# Altium PCB CarrierBoard.PcbDoc (part 1 of 2)
Units mm, origin at the board's own origin, x right, y up, seen from the top; angles counter-clockwise.
Board outline 96.12 x 102.87 mm, 2 copper layers (Top Layer, Bottom Layer), stack 1.6 mm thick; 58 components, 54 nets, 251 pads, 78 vias.
Unrouted connection lines stored in the file: 2.
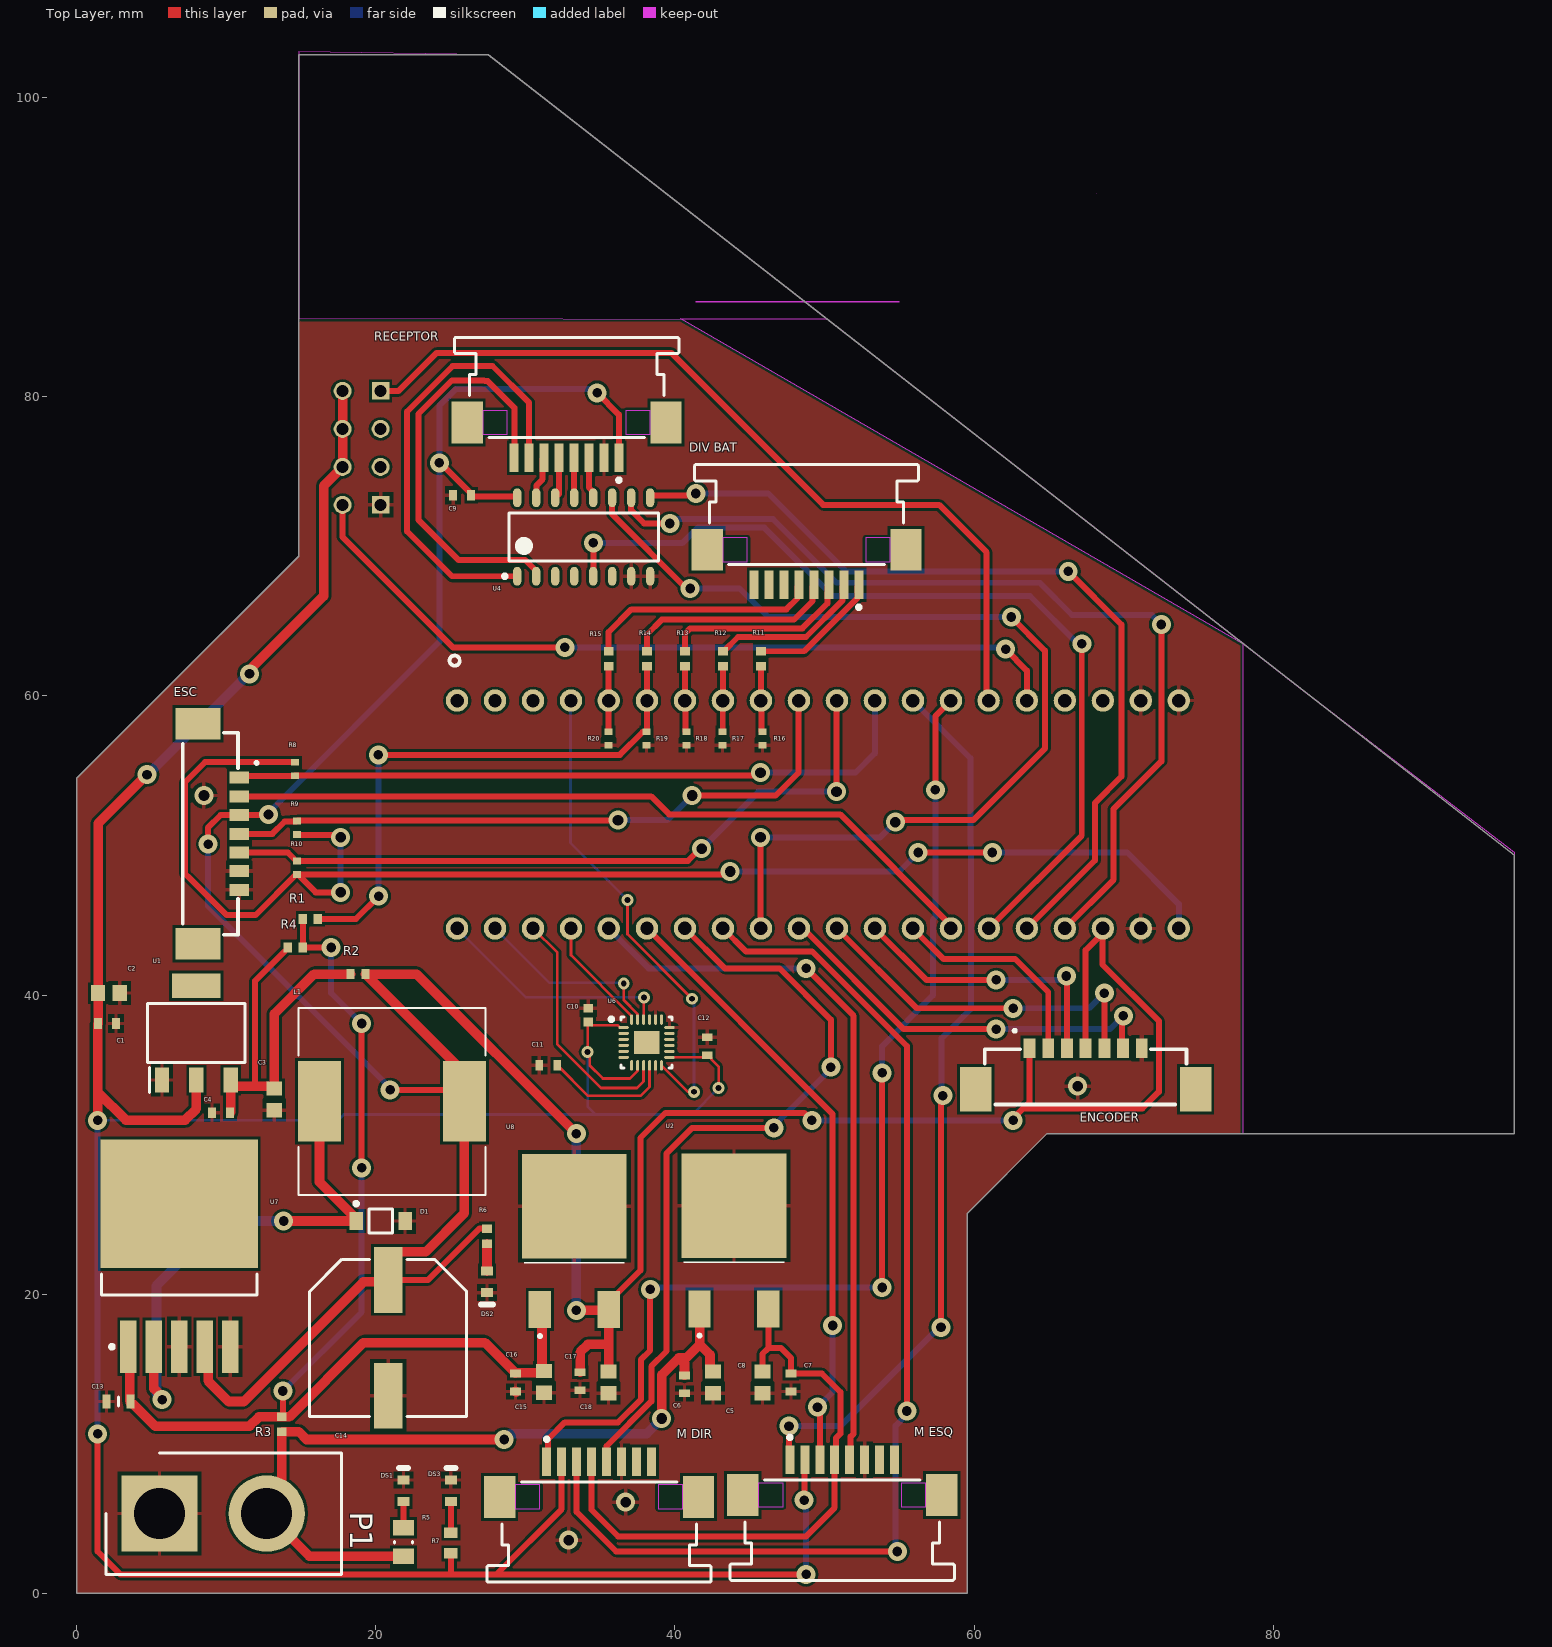
[diagram p0: Top Layer view]
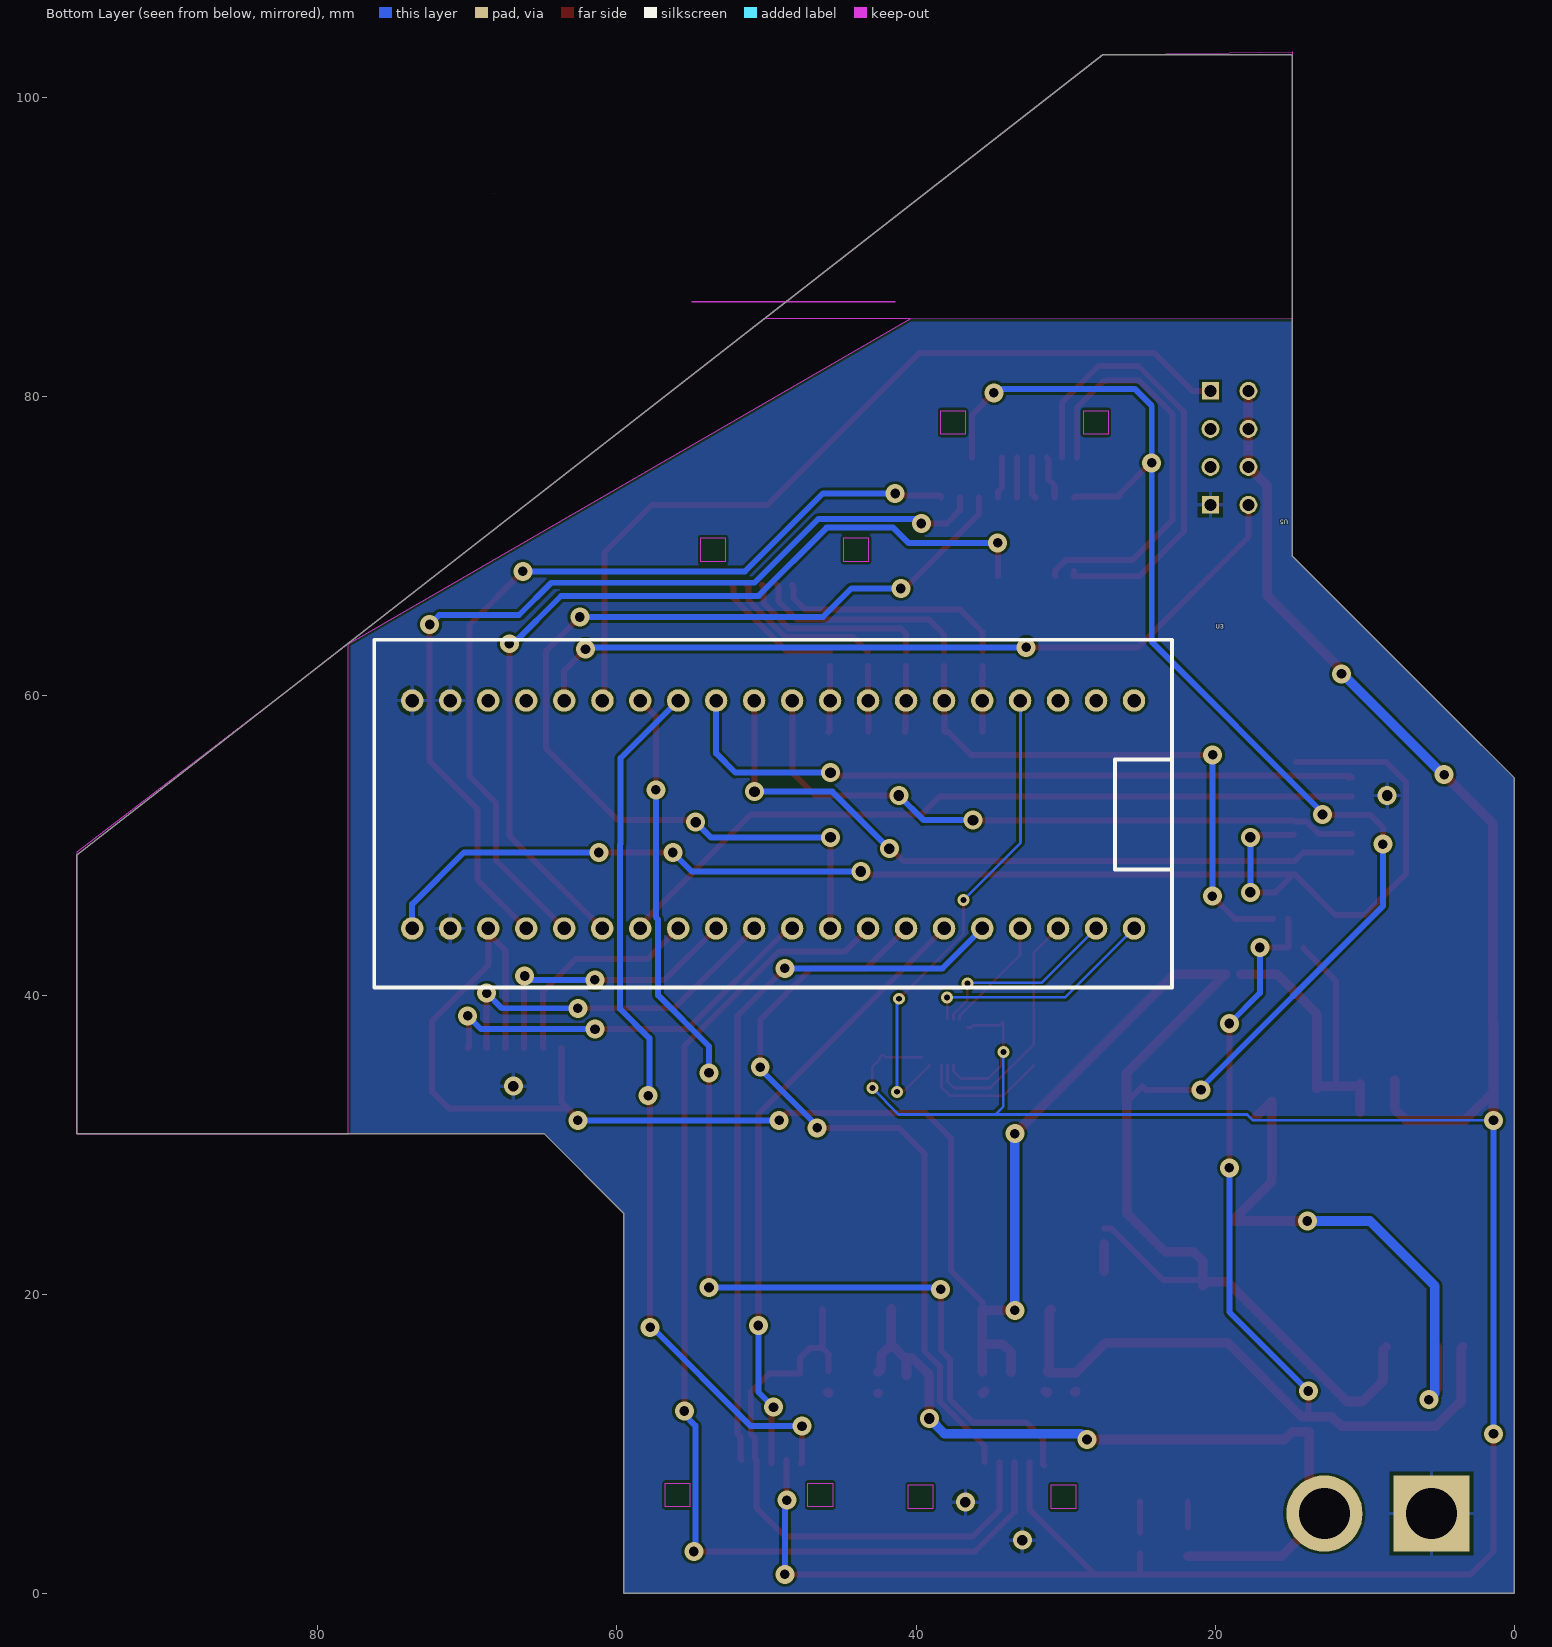
[diagram p1: Bottom Layer view, seen from below]

## Layer stack, top to bottom
Top Solder: solder mask 0.0102, Solder Resist, Dk 3.5
Top Layer: signal copper 0.0356
Dielectric 1: dielectric 1.5291, FR-4, Dk 4.8
Bottom Layer: signal copper 0.0356
Bottom Solder: solder mask 0.0102, Solder Resist, Dk 3.5

## Board outline
0,54.501 0,0 59.545,0 59.545,25.4 64.879,30.734 96.121,30.734 96.121,49.342 27.519,102.87 14.841,102.87 14.841,69.342 4.3,58.801
cut-out: 40.383,85.217 50.143,85.217 78.179,63.341
cut-out: 41.402,86.36
cut-out: 41.402,86.36 54.991,86.36
cut-out: 68.199,93.599
cut-out: 14.859,86.487
cut-out: 77.978,30.734 77.978,63.498 81.358,60.861 96.121,49.545 96.121,30.734
cut-out: 14.841,85.239 50.176,85.192 27.519,102.87 14.841,103.053

## Design rules (kind name [scope] priority, off if disabled: settings)
Clearance [All] p1: gap=0.178 ignorepadtopadclearanceinfootprint=TRUE
HoleSize [All] p1: absolutevalues=TRUE maxlimit=3.556 minlimit=0.025 maxpercent=80.000 minpercent=20.000
HoleToHoleClearance [All] p1: gap=0.178 allowstackedmicrovias=TRUE
MinimumSolderMaskSliver [All] p1: minsoldermaskwidth=0.114
PolygonConnect PolygonConnect_1 [All vs IsNamedPolygon('GND')] p1: connectstyle=Direct reliefconductorwidth=0.254 reliefentries=4 polygonreliefangle="90 Angle" airgapwidth=0.254
PolygonConnect [All] p2: connectstyle=Relief reliefconductorwidth=0.254 reliefentries=4 polygonreliefangle="90 Angle" airgapwidth=0.254
RoutingVias [All] p1: holewidth=0.4 width=0.797 viastyle="Through Hole" minholewidth=0.642 minwidth=1.27 maxholewidth=0.642 maxwidth=1.27
SilkToSolderMaskClearance [IsPad] p1: minsilkscreentomaskgap=0.084 clearancetoexposedcopper=TRUE
SolderMaskExpansion [All] p1: expansion=0.102
Width [All] p1: maxlimit=0.642 minlimit=0.178 preferedwidth=0.4
26 further rules are at their usual default settings.

## Classes and differential pairs
component class Designator: C13 C14 C15 C16 C17 C18 D1 L1 U7 U8
component class CarrierBoard: C1 C2 C3 C4 C5 C6 C7 C8 DS1 DS2 DS3 P1 R1 R2 R3 R4 R5 R6 U1 U2

## Components (designator, comment, footprint, x,y, rotation, side; value= is the part's Value field where it differs from the comment)
C1 "C1005X7R1H104K050BB" TDK-C1005-2_M 2.032,38.1 r180 top
C2 "1uF" CAPC1608X90X35ML10T15 2.159,40.132 r180 top
C3 "1uF" CAPC1608X90X35ML10T15 13.208,33.02 r90 top
C4 "C1005X7R1H104K050BB" TDK-C1005-2_M 9.652,32.131 r0 top
C5 "1uF" CAPC1608X90X35ML10T15 42.545,14.097 r90 top
C6 "C1005X7R1H104K050BB" TDK-C1005-2_M 40.64,13.97 r90 top
C7 "C1005X7R1H104K050BB" TDK-C1005-2_M 47.752,14.097 r90 top
C8 "1uF" CAPC1608X90X35ML10T15 45.847,14.097 r90 top
C9 "C1005X7R1H104K050BB" TDK-C1005-2_M 25.769,73.418 r0 top
C10 "10n" CAPC1005X55N 34.2,38.656 r90 top
C11 "C1005X7R1H104K050BB" TDK-C1005-2_M 31.531,35.306 r0 top
C12 "C1005X7R1H104K050BB" TDK-C1005-2_M 42.164,36.576 r270 top
C13 "C1608X5R1V335K080AC" CAPC1608X80N 2.794,12.827 r0 top
C14 "EEE-FK1H221P" PNSC-EEE-1HA221P_L 20.828,17.083 r270 top
C15 "1uF" CAPC1608X90X35ML10T15 31.242,14.134 r90 top
C16 "C1005X7R1H104K050BB" TDK-C1005-2_M 29.337,14.097 r90 top
C17 "C1005X7R1H104K050BB" TDK-C1005-2_M 33.655,14.183 r90 top
C18 "1uF" CAPC1608X90X35ML10T15 35.56,14.097 r90 top
D1 "MBR0540T1G" ONSC-SOD-123-2-425-04_V 20.32,24.892 r0 top
"DIV BAT" "52271-0879" MOLX-52271-0879 48.795,68.599 r180 top (schematic designator J6)
DS1 "TLMB1100-GS08" VISH-TLMX1100-2_V 21.844,6.858 r90 top
DS2 "TLMS1100-GS08" VISH-TLMX1100_V 27.432,20.828 r270 top
DS3 "TLMY1100-GS08" VISH-TLMX1100-2_V 25.019,6.858 r90 top
ENCODER "53398-0771" 53398-0771 60.707,36.381 r0 top
ESC "53398-0771" 53398-0771 10.795,57.531 r270 top
L1 "SRR1260-101M" *INDP125125X600N 21.082,32.893 r0 top
"M DIR" "52271-0879" MOLX-52271-0879 34.925,7.62 r0 top (schematic designator J7)
"M ESQ" "52271-0879" MOLX-52271-0879 51.181,7.747 r0 top (schematic designator J8)
P1 "VBAT5S" SHDR2W320P716_1X2_1574X813X1588P 5.537,5.334 r0 top
R1 "Jumper" RESC0402(1005)_N 15.621,45.085 r180 top value="0.00 Ohm"
R2 "Jumper" RESC0402(1005)_N 18.804,41.402 r180 top value="0.00 Ohm"
R3 "Jumper" RESC0402(1005)_N 13.716,11.303 r90 top value="0.00 Ohm"
R4 "Jumper" RESC0402(1005)_N 14.613,43.18 r180 top value="0.00 Ohm"
R5 "1K" RESC0805(2012)_N 21.844,3.429 r270 top value="1000.00 Ohm"
R6 "270R" RESC0402(1005)_N 27.432,23.876 r90 top value="270.00 Ohm"
R7 "220R" RESC1608X55X25NL10T15 25.019,3.364 r270 top
R8 "10K" RESC0402(1005)_L 14.605,55.118 r90 top value="10000.00 Ohm"
R9 "10K" RESC0402(1005)_L 14.732,51.181 r90 top value="10000.00 Ohm"
R10 "10K" RESC0402(1005)_L 14.732,48.514 r270 top value="10000.00 Ohm"
R11 "56K" RESC0402(1005)_N 45.749,62.484 r90 top value="56000.00 Ohm"
R12 "56K" RESC0402(1005)_N 43.209,62.484 r90 top value="56000.00 Ohm"
R13 "56K" RESC0402(1005)_N 40.669,62.484 r90 top value="56000.00 Ohm"
R14 "56K" RESC0402(1005)_N 38.129,62.484 r90 top value="56000.00 Ohm"
R15 "56K" RESC0402(1005)_N 35.569,62.484 r90 top value="56000.00 Ohm"
R16 "10K" RESC0402(1005)_L 45.847,57.15 r90 top value="10000.00 Ohm"
R17 "10K" RESC0402(1005)_L 43.18,57.15 r90 top value="10000.00 Ohm"
R18 "10K" RESC0402(1005)_L 40.767,57.15 r90 top value="10000.00 Ohm"
R19 "10K" RESC0402(1005)_L 38.1,57.15 r90 top value="10000.00 Ohm"
R20 "10K" RESC0402(1005)_L 35.56,57.15 r90 top value="10000.00 Ohm"
RECEPTOR "52271-0879" MOLX-52271-0879 32.754,77.101 r180 top (schematic designator J5)
U1 "LD1117S33CTR" SOT230P700X190-4N 8.001,37.465 r90 top
U2 "AS7815ADTR-G1" ZLDO1117K50TC 43.942,22.728 r0 top
U3 "Blue Pill" "blue pill" 19.333,63.464 r0 bottom
U4 "SN74LS151DR" D0016A_L 33.897,70.624 r90 top
U5 "ESP8266 Wifi module 01" ESP01 16.179,83.835 r0 bottom
U6 "MPU-9250" INSE-QFN-24-1700X1540TP_L 38.1,36.83 r0 top
U7 "LM2596SX-5.0/NOPB" TS5B_M 6.858,22.535 r90 top
U8 "AS7805ADTR-G1" ZLDO1117K50TC 33.274,22.698 r0 top

## Footprints (in the part's own frame and the unit in brackets; to place one, negate y for a bottom-side part, rotate by r counter-clockwise, add the part's x,y. Pads: shape width x height; smd on the part's side, far side on the other; paste and mask are expansions set on the pad)
53398-0771 [mm]
  rect 0.8x1.3 smd: 1(3,0.068) 2(4.25,0.068) 3(5.5,0.068) 4(6.75,0.068) 5(8,0.068) 6(9.25,0.068) 7(10.5,0.068)
  rect 2.1x3 smd: 8(-0.6,-2.682) 9(14.1,-2.682)
  silkscreen extent 0,-3.7 13.5,1.3
*INDP125125X600N [mm]
  rect 2.9x5.4 smd: 1(-4.85,0) 2(4.85,0)
  silkscreen extent -6.25,-6.25 6.25,6.25
"blue pill" [mm]
  round 1.5 hole 0.9: 1(6.096,3.774) 2(8.636,3.774) 3(11.176,3.774) 4(13.716,3.774) 5(16.236,3.774) 6(18.796,3.774) 7(21.336,3.774) 8(23.876,3.774) 9(26.416,3.774) 10(28.956,3.774) 11(31.496,3.774) 12(34.036,3.774) 13(36.576,3.774) 14(39.116,3.774) 15(41.636,3.774) 16(44.196,3.774) 17,(46.736,3.774) 18(49.276,3.774) 19(51.816,3.774) 20(54.356,3.774) 21(54.356,19.014) 22(51.816,19.014) 23(49.276,19.014) 24(46.736,19.014) 25(44.196,19.014) 26(41.656,19.014) 27(39.116,19.014) 28(36.576,19.014) 29(34.036,19.014) 30(31.496,19.014) 31(28.956,19.014) 32(26.416,19.014) 33(23.876,19.014) 34(21.336,19.014) 35(18.796,19.014) 36(16.236,19.014) 37(13.716,19.014) 38(11.176,19.014) 39(8.636,19.014) 40(6.096,19.014)
  silkscreen extent 3.56,-0.29 56.9,22.95, body extent 0.1,-0.04 57.66,22.82, height 9.77
CAPC1005X55N [mm]
  rect 0.6x0.62 smd: 1(-0.46,0) 2(0.46,0)
  body extent -0.5,-0.25 0.5,0.25, height 0.55
CAPC1608X80N [mm]
  rect 0.54x0.94 smd: 1(-0.8,0) 2(0.8,0)
  silkscreen extent 0,-0.3 0,0.3, body extent -0.8,-0.4 0.8,0.4, height 0.8
CAPC1608X90X35ML10T15 [mm] "Chip Capacitor, 2-Leads, Body 1.60x0.80mm, IPC Low Density"
  rect 0.95x1.05 smd: 1(-0.725,0) 2(0.725,0)
  body extent -0.85,-0.45 0.85,0.45, height 0.9
D0016A_L [mm] "SOIC, 16-Leads, Body 10x4mm, Pitch 1.27mm, IPC High Density"
  oval 1.25x0.55 smd: 1(-2.625,4.445) 2(-2.625,3.175) 3(-2.625,1.905) 4(-2.625,0.635) 5(-2.625,-0.635) 6(-2.625,-1.905) 7(-2.625,-3.175) 8(-2.625,-4.445) 9(2.625,-4.445) 10(2.625,-3.175) 11(2.625,-1.905) 12(2.625,-0.635) 13(2.625,0.635) 14(2.625,1.905) 15(2.625,3.175) 16(2.625,4.445)
  silkscreen extent -2.75,-5 1.6,5.39, body extent -3,-4.95 3,4.95, height 1.59
ESP01 [mil]
  round 47.25 / inner round 60 / far side round 47.25 hole 31.5: CH_PD(63.05,335.59) GPIO0(163.05,235.59) GPIO2(163.05,335.59) RST(63.05,235.59) TX(63.05,435.59) VCC(63.05,135.59)
  rect 45.75x45.75 / inner rect 60x60 / far side rect 45.75x45.75 hole 31.5: GND(163.05,435.59) RX(163.05,135.59)
  body extent 3,0 987,570, height 137
INSE-QFN-24-1700X1540TP_L [mm] "QFN, 24-Leads, Body 3.1x3.1mm, Pitch 0.40mm, Thermal Pad 1.54x1.70mm, IPC High Density"
  oval 0.7x0.2 smd: 1(-1.532,1) 2(-1.532,0.6) 3(-1.532,0.2) 4(-1.532,-0.2) 5(-1.532,-0.6) 6(-1.532,-1) 13(1.532,-1) 14(1.532,-0.6) 15(1.532,-0.2) 16(1.532,0.2) 17(1.532,0.6) 18(1.532,1)
  oval 0.2x0.7 smd: 7(-1,-1.532) 8(-0.6,-1.532) 9(-0.2,-1.532) 10(0.2,-1.532) 11(0.6,-1.532) 12(1,-1.532) 19(1,1.532) 20(0.6,1.532) 21(0.2,1.532) 22(-0.2,1.532) 23(-0.6,1.532) 24(-1,1.532)
  rect 1.7x1.54 smd: 25(0,0)
  silkscreen extent -2.47,-1.7 1.7,1.7, body extent -1.55,-1.55 1.55,1.55, height 1.05
MOLX-52271-0879 [mm] "FPC Connector, 8-Leads, Right Angle, Pitch 1.0 mm, Mated Height 3.0 mm, SMT"
  rect 0.6x1.9 smd: 1(-3.5,1.175) 2(-2.5,1.175) 3(-1.5,1.175) 4(-0.5,1.175) 5(0.5,1.175) 6(1.5,1.175) 7(2.5,1.175) 8(3.5,1.175)
  rect 2.1x2.8 smd: MP1(-6.65,-1.175) MP2(6.65,-1.175)
  Keep-Out Layer region: -5.6,-1.975 -3.95,-1.975 -3.95,-0.375 -5.6,-0.375
  Keep-Out Layer region: 3.95,-1.975 5.6,-1.975 5.6,-0.375 3.95,-0.375
  silkscreen extent -7.5,-6.87 7.5,2.8, body extent -7.5,-6.87 7.5,1.83, height 3.01
ONSC-SOD-123-2-425-04_V [mm] "SOD, 2-Leads, Body 2.69x1.6mm"
  rect 0.91x1.22 smd: 1(-1.635,0) 2(1.635,0)
  silkscreen extent -1.76,-0.8 0.78,1.28, body extent -1.35,-0.8 1.35,0.8, height 1.35
PNSC-EEE-1HA221P_L [mm] "Aluminum Electrolytic Capacitor, 2-Leads, Body 10.5x10.5mm, IPC High Density"
  rect 4.4x1.9 smd: 1(-3.875,0) 2(3.875,0)
  silkscreen extent -5.25,-5.25 5.25,5.25, body extent -5.36,-5.25 5.36,5.25, height 10.5
RESC0402(1005)_L [mm] "Chip Resistor, Body 1.0x0.5mm, IPC High Density"
  rect 0.45x0.55 smd: 1(-0.45,0) 2(0.45,0)
  body extent -0.52,-0.27 0.53,0.28, height 0.4
RESC0402(1005)_N [mm] "Chip Resistor, Body 1.0x0.5mm, IPC Medium Density"
  rect 0.55x0.65 smd: 1(-0.5,0) 2(0.5,0)
  body extent -0.52,-0.27 0.53,0.28, height 0.4
RESC0805(2012)_N [mm] "Chip Resistor, Body 2.0x1.3mm, IPC Medium Density"
  rect 1.05x1.4 smd: 1(-0.95,0) 2(0.95,0)
  silkscreen extent -0.05,-0.6 0.05,0.6, body extent -1.1,-0.67 1.1,0.68, height 0.7
RESC1608X55X25NL10T15 [mm] "Chip Resistor, 2-Leads, Body 1.60x0.80mm, IPC Medium Density"
  rect 0.7x0.9 smd: 1(-0.7,0) 2(0.7,0)
  body extent -0.85,-0.45 0.85,0.45, height 0.55
SHDR2W320P716_1X2_1574X813X1588P [mm]
  rect 5.1x5.1 hole 3.4: 1(0,0)
  round 5.1 hole 3.4: 2(7.163,0)
  silkscreen extent -3.58,-4.06 12.15,4.06
SOT230P700X190-4N [mm]
  rect 1.65x0.95 smd: 1(-3.15,2.3) 2(-3.15,0) 3(-3.15,-2.3)
  rect 1.65x3.25 smd: 4(3.15,0)
  silkscreen extent -3.98,-3.25 1.97,3.25
TDK-C1005-2_M [mm] "Chip Capacitor, 2-Leads, Body 1.05x0.55mm, IPC Low Density"
  rect 0.52x0.72 smd: 1(-0.6,0) 2(0.6,0)
  body extent -0.52,-0.28 0.53,0.27, height 0.55
TS5B_M [mm] "D2-PAK, 6-Leads, Body 8.6x10.2mm, Pitch 1.7mm, Lead Span 14.1mm, IPC Low Density"
  rect 3.5x1.1 smd: 1(-6.05,3.4) 2(-6.05,1.7) 3(-6.05,0) 4(-6.05,-1.7) 5(-6.05,-3.4)
  rect 8.6x10.5 smd: 6(3.5,0)
  silkscreen extent -6.17,-5.2 -1.2,5.2, body extent -2.6,-5.2 6.29,5.2, height 4.65
VISH-TLMX1100-2_V [mm] "SMD, 2-Leads, Body 1.6x0.8mm"
  rect 0.6x0.8 smd: 1(-0.725,0) 2(0.725,0)
  silkscreen extent 1.53,-0.3 1.53,0.3, body extent -0.8,-0.4 0.8,0.4, height 0.65
VISH-TLMX1100_V [mm] "SMD, 2-Leads, Body 1.6x0.8mm"
  rect 0.6x0.8 smd: 1(-0.725,0) 2(0.725,0)
  silkscreen extent 1.53,-0.4 1.53,0.4, body extent -0.8,-0.4 0.8,0.4, height 0.65
ZLDO1117K50TC [mm]
  rect 1.5x2.5 smd: 1(-2.3,-3.72) 3(2.3,-3.72)
  rect 7x7 smd: 2(0,3.18)
  silkscreen extent -3.35,-5.6 3.35,-0.6

## Part data
C1 C4 C6 C7 C9 C11 C12 C16 C17: library part CMP-2000-05393-1, "Chip Capacitor, 0.1 uF, +/- 10%, 50 V, -55 to 125 degC, 0402(1005 Metric), RoHS, Tape and Reel", Capacitance=0.1µF, Manufacturer=TDK, Operating Temperature=-55degC~125degC, Package / Case=0402(1005Metric), PCN Part Number=MLCCPartNumberChange30/Nov/2012, Ratings=-, Standard Package=1, Temperature Coefficient=X7R, Tolerance=±10%, Voltage - Rated=50V, Applications=GeneralPurpose, Category=Capacitors, Datasheet URL=http://www.farnell.com/datasheets/1913358.pdf, Datasheet Version=Mar-15, Family=CeramicCapacitors, Features=-, Height - Seated (Max)=-, Kits=445-9021-KIT-ND-KITMLCC100PF-10UF04026.3-50V445-9003-KIT-ND-KITCAPCERHICAPMLCCSMD, Lead Spacing=-, Lead Style=-, Manufacturer URL=http://www.tdk.com/, Mounting Type=SurfaceMount,MLCC, Online Catalog=CSeries,GeneralPurpose, Other Names=445-5932-1, Packaging=CutTape(CT), Product Training Modules=CSeriesGeneralApplicationsSEAT,CCV,andTVCLDesignToolsGuidetoReplacinganElectrolyticCapacitorwithanMLCC, RoHS Information=RoHSCertificate-MLCC, Series=C
C2 C3 C5 C8 C15 C18: library part CMP-2006-02823-1, "MURATA   GRM188R61H105KAALD   Multilayer Ceramic Capacitor, GRM Series, 1 F,  10%, X5R, 50 V, 0603 [1608 Metric]", Case/Package=0603, Case Code (Metric)=1608, Dielectric=X7R, Manufacturer=Murata, Manufacturer Part Number=GRM188R61H105KAALD, Max Operating Temperature=85°C, Min Operating Temperature=-55°C, Package Quantity=4000, Supplier Part Number 1=81-GRM188R61H105KALD, Tolerance=10%, Voltage=50V, Capacitance=1uF, Case Code (Imperial)=0603, ComponentLink1Description=http://www.farnell.com/datasheets/2048611.pdf?src-supplier=Newark, ComponentLink1URL=http://www.farnell.com/datasheets/2048611.pdf?src-supplier=Newark, ComponentLink2Description=http://www.farnell.com/datasheets/1747450.pdf?src-supplier=Element14, ComponentLink2URL=http://www.farnell.com/datasheets/1747450.pdf?src-supplier=Element14, ComponentLink3Description=https://www.distrelec.biz/Web/Downloads/_t/ds/murata_MLCC_eng_tds.pdf?mime=application%2Fpdf&src-supplier=Distrelec, ComponentLink3URL=https://www.distrelec.biz/Web/Downloads/_t/ds/murata_MLCC_eng_tds.pdf?mime=application%2Fpdf&src-supplier=Distrelec, Composition=Ceramic, Datasheet=https://br.mouser.com/datasheet/2/281/murata_03052018_GRM_Series_1-1310166.pdf, Depth=0.8mm, Height=0.8mm, Lead Free="Lead Free", Length=1.6mm, Material=Ceramic, Mount="Surface Mount", Packaging="Tape and Reel", Part Number=GRM188R61H105KAALD, Radiation Hardening=No, REACH SVHC="No SVHC", Stock 1=0, Supplier 1=Mouser, Termination=SMD/SMT, Thickness=0.035inch, Voltage Rating=50V, Voltage Rating (DC)=50V, Weight=0.000222oz, Width=0.8mm
C10: library part GRM155R71E103JA01J, "Capacitor", Manufacturer_Name="Murata Electronics", Mouser Part Number=81-GRM155R71E103JA1J, Datasheet Link=http://www.murata.com/~/media/webrenewal/support/library/catalog/products/capacitor/mlcc/c02e.pdf, Height=0.55mm, Manufacturer_Part_Number=GRM155R71E103JA01J, Mouser Price/Stock=https://www.mouser.com/Search/Refine.aspx?Keyword=81-GRM155R71E103JA1J
C13: "Capacitor 3.3uF", Capacitance=3.3uF, Case/Package=0603, Case Code (Metric)=1608, Dielectric=X5R, Dielectric Material=Ceramic, Manufacturer=TDK, Max Operating Temperature=85°C, Min Operating Temperature=-55°C, Mouser Part Number=810-C1608X5R1V335KAC, Package Quantity=4000, Supplier Part Number 1=445-14167-1-ND, Tolerance=10%, Voltage Rating=35V, Case Code (Imperial)=0603, ComponentLink1Description=https://datasheet.ciiva.com/14909/tdkmlcccaprange-14909925.pdf?src-supplier=Digi-Key, ComponentLink1URL=https://datasheet.ciiva.com/14909/tdkmlcccaprange-14909925.pdf?src-supplier=Digi-Key, ComponentLink2Description=https://datasheet.ciiva.com/14909/tdkmlcccaprange-14909926.pdf?src-supplier=Digi-Key, ComponentLink2URL=https://datasheet.ciiva.com/14909/tdkmlcccaprange-14909926.pdf?src-supplier=Digi-Key, Datasheet Link=https://product.tdk.com/info/en/catalog/datasheets/mlcc_commercial_midvoltage_en.pdf, Height=0.8mm, Lead Free="Lead Free", Length=0.063inch, Manufacturer_Name=TDK, Manufacturer_Part_Number=C1608X5R1V335K080AC, Manufacturer Part Number=C1608X5R1V335K080AC, Mount="Surface Mount", Mouser Price/Stock=https://www.mouser.com/Search/Refine.aspx?Keyword=810-C1608X5R1V335KAC, Packaging="Tape and Reel", Pricing 1="1 = 0,45000, 10 = 0,31100, 100 = 0,18630, 500 = 0,13972, 1000 = 0,11799 (USD)", RoHS=Yes, Stock 1=4798, Supplier 1=Digi-Key, Termination=SMD/SMT, Thickness=0.035inch, Voltage Rating (DC)=35V, Weight=7.1E-05oz, Width=0.8mm
C14: library part CMP-2000-06200-1, "Aluminum Electrolytic Capacitor, 220 uF, +/- 20%, 50 V, -40 to 85 degC, 2-Pin SMD, RoHS, Tape and Reelhttps://br.mouser.com/ProductDetail/Panasonic/EEE-FK1H221P?qs=%2Fha2pyFaduioJWBrqH8qNcijPCQSw77%252BpLytlHuDdeup2lEE5e2lgA%3D%3D", AE Capacitor Case=RadialCan-SMD, Capacitance=220µF, Capacitance Tolerance=±20%, Life Time @ Temperature=2000hours@85°C, Manufacturer=Panasonic, Operating Temperature Max=85°C, Operating Temperature Min=-40°C, Package Description="2-Pin Surface Mount Device, Body 10.3 x 10.3 mm", Package Reference=SMD, Ripple Current AC=300mA, Voltage Rating=50V, Capacitance Tolerance ±=±20%, Capacitor Case Style=RadialCan-SMD, Datasheet URL=https://br.mouser.com/datasheet/2/315/ABA0000C1181-947564.pdf, Datasheet Version=11/2012, Diameter=10mm, Height=10.2mm, Lifetime @ Temperature=2000hours@85°C, Manufacturer URL=http://www.panasonic.com/, Mounting Technology=SurfaceMount, Packaging=CutTape, Product Range=PANASONIC-SSeries, SVHC=ToBeAdvised
D1: library part CMP-1055-00401-1, "Schottky Power Rectifier, 2-Pin SOD-123, Pb-Free, Tape and Reel", Manufacturer="On Semiconductor", ComponentLink1Description="Manufacturer URL", ComponentLink1URL=http://www.onsemi.com/, ComponentLink2Description=Datasheet, ComponentLink2URL=http://www.onsemi.cn/pub_link/Collateral/MBR0540T1-D.PDF, ComponentLink3Description="Package Specification", ComponentLink3URL=http://www.onsemi.com/pub_link/Collateral/425-04.PDF, Configuration=Single, Datasheet=https://br.mouser.com/datasheet/2/315/ABA0000C1181-947564.pdf, DatasheetVersion="Rev. 7", IFSM Max (A)=5.5, Mounting Technology="Surface Mount", PackageDescription="2-Pin SOD, Body 1.6 x 2.69 mm", PackageReference=SOD-123-2-425-04, PackageVersion="Rev. G, 10/2009", Packing="Tape and Reel", PartNumber=MBR0540T1G, RoHS=TRUE
"DIV BAT" "M DIR" "M ESQ" RECEPTOR: library part CMP-1241-00231-1, "1.0 mm Pitch Easy-On(TM) Type FPC Connector, 3.0 mm Mated Height, Right Angle, ZIF, SMT, Bottom Contact, 8 Circuits, -40 to 85 degC, ELV and RoHS Compliant, Tape and Reel", Current (Max per Contact)=0.5A, Manufacturer=Molex, Voltage (Max)="50V AC (RMS)/DC", Circuits (Loaded)=8, ComponentLink1Description="Manufacturer URL", ComponentLink1URL=http://www.molex.com/molex/index.jsp, ComponentLink2Description=Datasheet, ComponentLink2URL=http://www.molex.com/webdocs/datasheets/pdf/en-us/0522710879_FFC_FPC_CONNECTORS.pdf, ComponentLink3Description="Package Specification", ComponentLink3URL=http://www.molex.com/pdm_docs/sd/522710879_sd.pdf, Contact Position=Bottom, Durability (mating cycles max)=30, Entry Angle="90degrees Angle", Mated Height=3.00mm, Material - Metal="Phosphor Bronze", Material - Plating Mating=Tin-Bismuth, Material - Plating Termination=Tin-Bismuth, Mounting Technology="Surface Mount", Number of Rows=1, Orientation="Right Angle", PackageDescription="8-Lead FPC Connector, Pitch 1.0 mm", PackageReference=52271-0879, PackageVersion="Rev. B, 04/2004", Packing="Tape and Reel", PartNumber=52271-0879, PCB Locator=No, PCB Retention=Yes, Pitch - Mating Interface=1.00mm, Pitch - Termination Interface=1.00mm, Polarized to PCB=Yes, RoHS=TRUE, Stackable=No
DS1: library part CMP-1666-00028-1, "Blue LED, 10 mA, 3.9 V, -40 to 100 degC, 2-Pin SMD (0603), RoHS, Tape and Reel                  TLMB1100-GS08", Capacitance="10 nF", Case\Package=Radial, Max Operating Temperature="125 degC", Min Operating Temperature="-55 degC", Package Quantity=500, Tolerance=10%, Type (Capacitors)=X7R, Voltage Rating="100 V", ComponentLink1Description="Manufacturer URL", ComponentLink1URL=http://www.vishay.com/, ComponentLink2Description=Datasheet, ComponentLink2URL=http://download.siliconexpert.com/pdfs/2016/8/7/12/43/26/667/vsh_/manual/379263299541529tlmb1100.pdf, DatasheetVersion="Rev. 2.7, 03/2016", Height="2.54 mm", Lead Pitch="2.54 mm", Length="5.33 mm", Mount="Through Hole", PackageDescription="2-Pin Surface Mount Device, Body 1.6 x 0.8 mm", PackageReference=0603, Packaging=Bulk, Pins=2, Radiation Hardening=No, REACH SVHC="No SVHC", RoHSCompliant=true, Width="3.81 mm"
DS2: library part CMP-1666-00027-1, "LED, RED, 2.1 V, -40 to 100 degC, 2-Pin SMD (0603), RoHS, Tape and Reel", Capacitance="12 pF", Case/Package=0603, Case Code (Metric)=1608, Max Operating Temperature=125degC, Min Operating Temperature=-55degC, Package Quantity=4000, Resistance="100000000000 Ohm", Tolerance=5%, Type (Capacitors)=C0G, Voltage Rating="50 V", Case Code (Imperial)=0603, ComponentLink1Description="Manufacturer URL", ComponentLink1URL=http://www.vishay.com/, ComponentLink2Description=Datasheet, ComponentLink2URL=http://www.vishay.com/docs/83173/tlmb1100.pdf, DatasheetVersion="Rev. 2.7, 03/2016", Height="0.8 mm", Length="1.6 mm", Mount="Surface Mount", PackageDescription="2-Pin Surface Mount Device, Body 1.6 x 0.8 mm", PackageReference=TLMX1100, Packaging="Tape and Reel", Pins=2, Radiation Hardening=No, REACH SVHC="No SVHC", RoHSCompliant=True, Voltage Rating (DC)="50 V", Width="0.8 mm"
DS3: library part CMP-1666-00030-1, "Yellow LED, 20 mA, 2.1 V, -40 to 100 degC, 2-Pin SMD (0603), RoHS, Tape and Reel             TLMY1100-GS08", ComponentLink1Description="Manufacturer URL", ComponentLink1URL=http://www.vishay.com/, ComponentLink2Description=Datasheet, ComponentLink2URL=http://download.siliconexpert.com/pdfs/2016/8/7/12/43/26/667/vsh_/manual/379263299541529tlmb1100.pdf, DatasheetVersion="Rev. 2.7, 03/2016", PackageDescription="2-Pin Surface Mount Device, Body 1.6 x 0.8 mm", PackageReference=0603
ENCODER ESC: "7 way SMT straight header Molex PICOBLADE Series, Series Number 53398, 1.25mm Pitch 7 Way 1 Row Straight PCB Header, Solder Termination, 1A", Manufacturer_Name=Molex, RS Part Number=5427220P, Allied_Number=70373150, Allied Price/Stock=http://www.alliedelec.com/molex-incorporated-53398-0771/70373150/, Arrow Part Number=53398-0771, Arrow Price/Stock=http://uk.rs-online.com/web/p/products/5427220P, Datasheet Link=http://www.molex.com/webdocs/datasheets/pdf/en-us/0533980771_PCB_HEADERS.pdf, Manufacturer_Part_Number=53398-0771, RS Price/Stock=http://uk.rs-online.com/web/p/products/5427220P
L1: library part SRR1260-220M, "FIXED IND 100UH 1.7A 180 MOHM", Case/Package=1260, Current Rating=1.7A, DC Resistance (DCR)=180mR, Frequency=6.07MHz, Inductance=100uH, Inductance Tolerance=20%, Manufacturer=Bourns, Max Operating Temperature=125°C, Min Operating Temperature=-40°C, Mouser Part Number=652-SRR1260-220M, Package Quantity=600, Resistance=180MR, RS Part Number=7272246P, Supplier Part Number 1=652-SRR1260-101M, Test Frequency=100kHz, Allied_Number=70277063, Allied Price/Stock=https://www.alliedelec.com/bourns-srr1260-220m/70277063/, ComponentLink1Description=http://www.bourns.com/docs/Product-Datasheets/SRR1260.pdf?src-supplier=Digi-Key, ComponentLink1URL=http://www.bourns.com/docs/Product-Datasheets/SRR1260.pdf?src-supplier=Digi-Key, ComponentLink2Description=http://uk.rs-online.com/webdocs/0def/0900766b80defded.pdf?src-supplier=RSComponents, ComponentLink2URL=http://uk.rs-online.com/webdocs/0def/0900766b80defded.pdf?src-supplier=RSComponents, ComponentLink3Description=http://www.farnell.com/datasheets/1430852.pdf?src-supplier=Element14, ComponentLink3URL=http://www.farnell.com/datasheets/1430852.pdf?src-supplier=Element14, ComponentLink4Description=http://www.farnell.com/datasheets/1914016.pdf?src-supplier=Element14, ComponentLink4URL=http://www.farnell.com/datasheets/1914016.pdf?src-supplier=Element14, ComponentLink5Description=http://www.bourns.com/pdfs/SRR1260.pdf?src-supplier=Avnet, ComponentLink5URL=http://www.bourns.com/pdfs/SRR1260.pdf?src-supplier=Avnet, ComponentLink6Description=http://www.farnell.com/datasheets/2366825.pdf?src-supplier=Newark, ComponentLink6URL=http://www.farnell.com/datasheets/2366825.pdf?src-supplier=Newark, ComponentLink7Description=https://www.alliedelec.com/m/d/845565468e1e76a1db638ca94afd232b.pdf?src-supplier=Allied+Electronics, ComponentLink7URL=https://www.alliedelec.com/m/d/845565468e1e76a1db638ca94afd232b.pdf?src-supplier=Allied+Electronics, Composition=Wirewound, Core Material=Ferrite, Datasheet Link=https://componentsearchengine.com/Datasheets/2/SRR1260-220M.pdf, DC Current=1.7A, Depth=12.8mm, Height=6mm, Height - Seated (Max)=0.256inch, Length=12.5mm, Manufacturer_Name=Bourns, Manufacturer_Part_Number=SRR1260-220M, Manufacturer Part Number=SRR1260-101M, Material=Steel, Max DC Current=1.7A, Military Standard=Not, Mount="Surface Mount", Mouser Price/Stock=https://www.mouser.com/Search/Refine.aspx?Keyword=652-SRR1260-220M, Number of Pins=2, Packaging="Tape and Reel", Pricing 1="1=0.97, 10=0.833, 50=0.694, 100=0.652, 1000=0.447, 10000=0.446 (USD)", Q Factor=26, REACH SVHC="No SVHC", RMS Current (Irms)=1.7A, RS Price/Stock=http://uk.rs-online.com/web/p/products/7272246P, Saturation Current=1.7A, Self Resonant Frequency=6.07MHz, Shielding=Shielded, Stock 1=6993, Supplier 1=Mouser, Termination=SMD/SMT, Tolerance=20%, Width=12.5mm
P1: library part PRT-10474, "Connector", Manufacturer_Name=SparkFun, Mouser Part Number=474-PRT-10474, Datasheet Link=http://cdn.sparkfun.com/datasheets/Prototyping/xt60.pdf, Height=15.875mm, Manufacturer_Part_Number=PRT-10474, Mouser Price/Stock=https://www.mouser.com/Search/Refine.aspx?Keyword=474-PRT-10474
R1 R2 R3 R4: library part CMP-1011-00001-1, "Jumper 0402 (1005 Metric)", Case-EIA=0402, Case-Metric=1005, Manufacturer=Vishay, Manufacturer Part Number=CRCW04020000Z0ED, Max Operating Temperature=155°C, Max Power Dissipation=63mW, Min Operating Temperature=-55°C, Package Quantity=1, Power=None, Resistance=0mR, Supplier Part Number 1=71-CRCW0402-0-E3, Temperature Coefficient=100ppm/°C, Voltage Rating=50V, Case/Package=0402, Case Code (Imperial)=0402, Case Code (Metric)=1005, ComponentLink1Description=http://www.vishay.com/docs/20035/dcrcwe3.pdf?src-supplier=Avnet+Europe, ComponentLink1URL=http://www.vishay.com/docs/20035/dcrcwe3.pdf?src-supplier=Avnet+Europe, ComponentLink2Description=http://www.vishay.com/docs/20035/dcrcwe3.pdf?src-supplier=Avnet, ComponentLink2URL=http://www.vishay.com/docs/20035/dcrcwe3.pdf?src-supplier=Avnet, ComponentLink3Description=http://www.vishay.com/docs/20035/dcrcwe3.pdf?src-supplier=Digi-Key, ComponentLink3URL=http://www.vishay.com/docs/20035/dcrcwe3.pdf?src-supplier=Digi-Key, ComponentLink4Description=http://www.farnell.com/datasheets/2111203.pdf?src-supplier=Element14, ComponentLink4URL=http://www.farnell.com/datasheets/2111203.pdf?src-supplier=Element14, ComponentLink5Description=http://www.vishay.com/docs/20035/dcrcwe3.pdf?src-supplier=Allied+Electronics, ComponentLink5URL=http://www.vishay.com/docs/20035/dcrcwe3.pdf?src-supplier=Allied+Electronics, ComponentLink6Description=https://www.distrelec.biz/Web/Downloads/a_/en/flD-CRCW-e3_data_en.pdf?mime=application%2Fpdf&src-supplier=Distrelec, ComponentLink6URL=https://www.distrelec.biz/Web/Downloads/a_/en/flD-CRCW-e3_data_en.pdf?mime=application%2Fpdf&src-supplier=Distrelec, Composition="Thick Film", Contact Plating=Tin, Depth=0.5mm, Features="Automotive AEC-Q200", Height=0.35mm, Lead Free="Lead Free", Length=1mm, Military Standard=Not, Mount="Surface Mount", Number of Terminations=2, Packaging="Tape and Reel", Power Rating=63mW, Pricing 1="1=0.1, 10=0.017, 50=0.017, 100=0.007, 1000=0.005, 10000=0.004 (USD)", Radiation Hardening=No, REACH SVHC=Unknown, Stock 1=1223713, Supplier 1=Mouser, Technology=SMT, Termination=SMD/SMT, Tolerance=None, Voltage Rating (DC)=50V, Weight=2.3E-05oz, Width=0.5mm
R5: library part CMP-1013-00074-1, "1K 0.125W 5% 0805 (2012 Metric)  SMD", Case-EIA=0805, Case-Metric=2012, Manufacturer=Yageo, Manufacturer Part Number=RC0805JR-071KL, Max Operating Temperature=155°C, Min Operating Temperature=-55°C, Power="0.125 W", Power Rating=125mW, Resistance=1kR, Supplier Part Number 1=603-RC0805JR-071KL, Temperature Coefficient=100ppm/°C, Tolerance="5 %", Voltage Rating=150V, Case/Package=0805, Case Code (Imperial)=0805, Case Code (Metric)=2012, ComponentLink1Description=http://www.farnell.com/datasheets/2167052.pdf?src-supplier=Verical, ComponentLink1URL=http://www.farnell.com/datasheets/2167052.pdf?src-supplier=Verical, ComponentLink2Description=http://www.farnell.com/datasheets/2167052.pdf?src-supplier=Mouser, ComponentLink2URL=http://www.farnell.com/datasheets/2167052.pdf?src-supplier=Mouser, ComponentLink3Description=http://www.farnell.com/datasheets/442941.pdf?src-supplier=Element14, ComponentLink3URL=http://www.farnell.com/datasheets/442941.pdf?src-supplier=Element14, ComponentLink4Description=http://www.farnell.com/datasheets/444164.pdf?src-supplier=Element14, ComponentLink4URL=http://www.farnell.com/datasheets/444164.pdf?src-supplier=Element14, Composition="Thick Film", Contact Plating=Tin,Lead,Matte, Depth=1.25mm, Lead Free="Lead Free", Length=2mm, Military Standard=Not, Packaging="Tape and Reel", Pricing 1="1=0.11, 10=0.026, 50=0.026, 100=0.009, 1000=0.007, 10000=0.004 (USD)", Radiation Hardening=No, REACH SVHC=Unknown, Stock 1=1222072, Supplier 1=Mouser, Technology=SMT, Termination=SMD/SMT
R6: library part CMP-1011-00060-1, "270R 0.063W 5% 0402 (1005 Metric)  SMD                             603-AC0402JR-07270RL", Case-EIA=0402, Case-Metric=1005, Manufacturer=Yageo, Manufacturer Part Number=AC0402JR-07270RL, Max Operating Temperature=155°C, Max Power Dissipation=63mW, Min Operating Temperature=-55°C, Power="0.063 W", Supplier Part Number 1=603-AC0402JR-07270RL, Temperature Coefficient=100ppm/°C, Tolerance="5 %", Case/Package=0402, Case Code (Imperial)=0402, Case Code (Metric)=1005, Composition="Thick Film", Features="Moisture Resistant,Automotive AEC-Q200", Height=0.015inch, Length=0.039inch, Number of Terminations=2, Packaging="Tape and Reel", Pricing 1="1=0.1, 10=0.015, 50=0.015, 100=0.005, 1000=0.004, 10000=0.004 (USD)", Resistance=270R, Stock 1=82259, Supplier 1=Mouser, Technology=SMT, Width=0.02inch
R7: library part CMP-2000-04878-1, "Res 0603 220 Ohm 5% 0.1W(1/10W) ±100ppm/C Sulfur Resistant Pad SMD Automotive T/R", Case/Package=0603, Manufacturer=Yageo, Manufacturer Part Number 1=AF0603JR-07220RL, Max Operating Temperature=155°C, Max Power Dissipation=100mW, Min Operating Temperature=-55°C, Part Number=AF0603FR-07130RL, Supplier Part Number 1=603-AF0603JR-07220RL, Temperature Coefficient=100ppm/°C, Tolerance=5%, ComponentLink1Description=http://www.yageo.com/documents/recent/PYu-AF_51_RoHS_L_5.pdf?src-supplier=Digi-Key, ComponentLink1URL=http://www.yageo.com/documents/recent/PYu-AF_51_RoHS_L_5.pdf?src-supplier=Digi-Key, Composition="Thick Film", Features="Moisture Resistant", Height=0.022inch, Lead Free="Lead Free", Length=0.063inch, Manufacturer 1=Yageo, Number of Terminations=2, Packaging="Tape and Reel", Pricing 1="1=0,12000, 10=0,02700, 50=0,02700, 100=0,00900, 1000=0,00800, 10000=0,00500 (USD)", Resistance=220R, RoHS=Yes, Stock 1=9358, Supplier 1=Mouser, Width=0.031inch
R8 R9 R10 R16 R17 R18 R19 R20: library part CMP-1011-00623-1, "10K 0.063W 1% 0402 (1005 Metric)  SMD", Case-EIA=0402, Case-Metric=1005, Case/Package=Molded, Manufacturer=Vishay, Manufacturer Part Number=ERJ-2RKF1002X, Max Operating Temperature=155°C, Min Operating Temperature=-55°C, Power="0.063 W", Power Rating=62.5mW, Resistance=10kR, Supplier Part Number 1=71-CRCW040210K0FKEDC, Temperature Coefficient=100ppm/°C, Tolerance="1 %", Composition="Thick Film", Contact Plating=Tin, Lead Free="Lead Free", Length=1mm, Mount="Surface Mount", Pricing 1="1=0.13, 10=0.051, 50=0.051, 100=0.029, 1000=0.029, 10000=0.005 (USD)", Stock 1=1778155, Supplier 1=Mouser, Technology=SMT, Termination=Wraparound
R11 R12 R13 R14 R15: library part CMP-1011-00708-1, "56K 0.063W 1% 0402 (1005 Metric)  SMD", Case-EIA=0402, Case-Metric=1005, Manufacturer=Bourns, Manufacturer Part Number=CR0402-FX-5602GLF, Max Operating Temperature=125°C, Max Power Dissipation=63mW, Min Operating Temperature=-55°C, Package Quantity=1, Power="0.063 W", Power Rating=62.5mW, Resistance=56kR, Supplier Part Number 1=652-CR0402FX-5602GLF, Temperature Coefficient=100ppm/°C, Tolerance="1 %", Voltage Rating=50V, Case/Package=0402, Case Code (Imperial)=0402, Case Code (Metric)=1005, ComponentLink1Description=https://www.bourns.com/docs/Product-Datasheets/CR0402.pdf?src-supplier=Digi-Key, ComponentLink1URL=https://www.bourns.com/docs/Product-Datasheets/CR0402.pdf?src-supplier=Digi-Key, ComponentLink2Description=http://www.bourns.com/pdfs/CR0402.pdf?src-supplier=Avnet, ComponentLink2URL=http://www.bourns.com/pdfs/CR0402.pdf?src-supplier=Avnet, Composition="Thick Film", Contact Plating=Tin, Depth=0.5mm, Height=0.016inch, Length=1mm, Military Standard=Not, Mount="Surface Mount", Number of Terminations=2, Packaging="Tape and Reel", Pricing 1="1=0.1, 10=0.022, 50=0.022, 100=0.013, 1000=0.008, 10000=0.005 (USD)", Radiation Hardening=No, Stock 1=37564, Supplier 1=Mouser, Technology=SMT, Termination=SMD/SMT, Thickness=356um, Width=0.5mm
U1: "Integrated Circuit", Manufacturer_Name=STMicroelectronics, Mouser Part Number=511-LD1117S33C, RS Part Number=1657750, Allied_Number=70390200, Allied Price/Stock=http://www.alliedelec.com/stmicroelectronics-ld1117s33ctr/70390200/, Datasheet Link=http://www.st.com/st-web-ui/static/active/en/resource/technical/document/datasheet/CD00000544.pdf, Height=1.9mm, Manufacturer_Part_Number=LD1117S33CTR, Mouser Price/Stock=https://www.mouser.com/Search/Refine.aspx?Keyword=511-LD1117S33C, RS Price/Stock=http://uk.rs-online.com/web/p/products/1657750
U2: library part AS7805ADTR-G1, "Integrated Circuit", Case/Package=TO-252-3, Dropout Voltage=2V, Manufacturer=Diodes, Manufacturer_Name="Diodes Inc.", Max Operating Temperature=125°C, Min Operating Temperature=-40°C, Mouser Part Number=621-AS7805ADTR-G1, Output Current=1A, Output Voltage=15V, Supplier Part Number 1=621-AS7815ADTR-G1, Datasheet Link=https://www.diodes.com/assets/Datasheets/AS78XXA.pdf, Height=2mm, Manufacturer_Part_Number=AS7805ADTR-G1, Manufacturer Part Number=AS7815ADTR-G1, Mount="Surface Mount", Mouser Price/Stock=https://www.mouser.com/Search/Refine.aspx?Keyword=621-AS7805ADTR-G1, Number of Regulators=1, Packaging="Tape and Reel", Pricing 1="1=0.43, 10=0.354, 50=0.354, 100=0.216, 1000=0.167, 10000=0.142 (USD)", Stock 1=1565, Supplier 1=Mouser
U4: library part CMP-1633-00148-1, "8-Line To 1-Line Data Selectors/Multiplexers, D0016A, LARGE T&R", F @ Nom Voltage(Max)(Mhz)=35, Generic Part Number=SN74LS151, ICC @ Nom Voltage(Max)(mA)=10, Manufacturer="Texas Instruments", Operating Temperature Range(C)="0 to 70", Rating=Catalog, tpd @ Nom Voltage(Max)(ns)=38, Voltage(Nom)(V)=5, Bits(#)=16, Channels(#)=1, Code_JEDEC="MS-012 variation AC", ComponentLink1Description="Manufacturer URL", ComponentLink1URL=http://www.ti.com/, ComponentLink2Description=Datasheet, ComponentLink2URL=http://www.ti.com/lit/ds/symlink/sn74ls151.pdf, ComponentLink3Description="Package Specification", ComponentLink3URL=http://www.ti.com/lit/ml/mpds178g/mpds178g.pdf, Configuration="\"16\",\"1\"", DatasheetVersion=SDLS054, Function=Encoder/Multiplexer, Input Type=TTL, Output Drive (IOL/IOH)(Max)(mA)=8/-0.4, Output Type=TTL, PackageReference=D0016A, PartNumber=SN74LS151DR, Schmitt Trigger=No, Technology Family=LS, Type=Standard, VCC(Max)(V)=5.25, VCC(Min)(V)=4.75
U5: library part ESP01, "ESP-01", DeviceSetName=ESP01, GateName_1=G$1, LibraryName=esp8266modules, Package=ESP01, SymbolName_1=ESP01
U6: library part CMP-2100-03657-1, "9-axis MotionTracking device, 2.4 to 3,6 V, -40 to 85 degC, 24-Pin QFN, RoHS, Tape and Reel", Case/Package=QFN, Manufacturer=InvenSense, Max Operating Temperature=85degC, Max Supply Voltage=3.6V, Min Operating Temperature=-40degC, Min Supply Voltage=2.4V, Package Description="24-Pin Quad Flat No-lead Package, Body 3 x 3 mm, Pitch 0.4 mm", Package Quantity=1, Package Reference=QFN-24, Datasheet URL=http://datasheet.octopart.com/MPU-9250-InvenSense-datasheet-21859386.pdf, Datasheet Version="Rev. 1.0, 01/2014", Height=1mm, Length=3.1mm, Manufacturer URL=http://www.invensense.com/, Mount=SurfaceMount, RoHSCompliant=true, Width=3.1mm
U7: library part CMP-0069-00282-2, "SIMPLE SWITCHER® Power Converter 150 KHz 3A Step-Down Voltage Regulator, 5-pin TO-263", Manufacturer="Texas Instruments", PackageTopMarking="NSUZXYTTE#*LM2596S*-5.0 P+", PowerWise=N, Code_JEDEC=MO-169-AB, ComponentLink1Description="LM2596 Datasheet", ComponentLink1URL=http://www.national.com/ds/LM/LM2596.pdf, ComponentLink2Description="LM2596 Web Page", ComponentLink2URL=http://www.national.com/pf/LM/LM2596.html, ComponentLink3Description="TS5B Package Page", ComponentLink3URL=http://www.national.com/packaging/folders/ts5b.html, CompType=Switcher, DatasheetVersion=May-2002, PackageDescription="TO-263, Molded, .400 x .390 x .180in, 5 Lead, .067in Pitch, Surface Mount", PackageReference=TS5B, PinCount=5, RevisionNote="Component URLs added", RoHS=N
U8: "Integrated Circuit", Manufacturer_Name="Diodes Inc.", Mouser Part Number=621-AS7805ADTR-G1, Datasheet Link=https://www.diodes.com/assets/Datasheets/AS78XXA.pdf, Height=2mm, Manufacturer_Part_Number=AS7805ADTR-G1, Mouser Price/Stock=https://www.mouser.com/Search/Refine.aspx?Keyword=621-AS7805ADTR-G1

## Via types
v1: diameter 1.27, hole 0.642, Top Layer to Bottom Layer, 56 vias
v2: diameter 1.27, hole 0.711, Top Layer to Bottom Layer, 15 vias
v3: diameter 0.8, hole 0.4, Top Layer to Bottom Layer, 6 vias
v4: diameter 0.8, hole 0.374, Top Layer to Bottom Layer, 1 vias

## Nets (pads, with @x,y where several pads share a name; then routed paths per layer and width w, separated by ;. In a path a pad name is that pad's centre, name@x,y a point inside that pad or via, vN(x,y) a via of type N, cw(c..) or ccw(c..) an arc to the next point about the centre after c; other vN are vias at no path point)
0: "M DIR.6" "M ESQ.6" C1.1 C2.1 C3.1 C4.1 C5.1 C6.1 C7.1 C8.1 C9.1 C10.2 C11.1 C12.1 C13.1 C14.2 C15.1 C16.1 C17.1 C18.1 D1.2 DS1.2 DS2.2 DS3.2 ENCODER.7 ESC.6 ESC.7 P1.1 R16.1 R17.1 R18.1 R19.1 R20.1 RECEPTOR.2 U1.1 U2.2 U3.19 U3.20 U3.22 U4.7 U4.8 U5.GND U6.11 U6.18 U6.20 U7.3 U7.5 U8.2 | length 0.6
  Top Layer w0.642: C16.1 29.337,13.492 C16.1@29.376,13.453 ; C15.1@31.198,13.453 C15.1 C15.1@31.355,13.522 ; C18.1@35.41,13.522 C18.1 C18.1@35.51,13.372 ; C5.1@42.544,13.371 C5.1 ; C8.1 C8.1@45.911,13.436
  other v2: 32.893,3.556 36.703,6.096 66.929,33.909 8.509,53.34
3V3: "M DIR.2" "M ESQ.2" C1.2 C2.2 C10.1 C12.2 R7.2 U1.2 U5.CH_PD U5.RST U5.VCC U6.1 U6.8 U6.13 | length 221.9
  Top Layer w0.178: U6.1 36.312,37.83 36.157,37.985 34.411,37.985 C10.1 34.163,38.159 v3(34.163,36.195) 34.303,36.055 34.303,35.293 35.179,34.417 36.988,34.417 37.496,34.925 37.496,35.294 U6.8 ; U6.13 39.636,35.834 42.022,35.834 C12.2 42.264,35.976 42.435,35.805 42.435,35.705 42.926,35.214 v3(42.926,33.782)
  Top Layer w0.4: v1(1.397,10.668) 1.397,2.794 2.921,1.27 25.019,1.27 28.067,1.27 ; 25.019,1.524 R7.2 ; 32.425,8.795 32.425,5.628 28.067,1.27 ; v1(48.641,6.223) 48.661,6.243 48.661,8.902 ; 48.661,8.648 48.681,8.668 ; v1(48.768,1.27) 28.067,1.27
  Top Layer w0.642: v1(1.397,31.623) 1.397,33.528 ; v1(4.699,54.737) 1.434,51.472 C2.2 1.433,40.131 C1.2 C1.2 1.397,38.065 1.397,33.528 ; U1.2 8.001,32.385 7.251,31.635 3.29,31.635 1.397,33.528 ; v1(11.557,61.468) 11.557,61.722 16.51,66.675 16.51,74.041 U5.CH_PD U5.RST U5.VCC
  Bottom Layer w0.178: v1(1.397,31.623) 17.473,31.623 17.867,32.017 34.684,32.017 ; v3(34.163,36.195) 34.163,32.537 34.684,32.017 ; v3(42.926,33.782) 41.161,32.017 34.684,32.017
  Bottom Layer w0.4: v1(1.397,10.668) v1(1.397,31.623) ; v1(48.641,6.223) 48.768,6.096 v1(48.768,1.27)
  Bottom Layer w0.642: v1(4.699,54.737) 4.763,54.737 11.493,61.468 v1(11.557,61.468)
5V: C9.2 C14.1 C17.2 C18.2 ENCODER.1 ENCODER.4 ESC.3 L1.2 R2.1 R6.2 RECEPTOR.1 U3.23 U4.16 U7.4 U8.3 | length 253.9
  Top Layer w0.4: v1(8.792,50.09) 8.792,51.21 9.613,52.031 ESC.3 10.883,52.051 12.808,52.051 v1(12.827,52.07) ; C14.1 23.498,20.958 26.916,24.376 R6.2 ; v1(20.955,33.655) 24.614,33.655 24.868,33.909 L1.2@25.908,32.869 ; v1(24.245,75.577) 24.31,75.577 26.369,73.518 C9.2 26.369,73.394 26.429,73.334 29.382,73.334 29.452,73.265 U4.16 ; v1(34.798,80.264) 36.254,78.808 RECEPTOR.1 ; U8.3 35.574,19.478 37.681,21.585 37.681,30.442 39.367,32.128 48.644,32.128 v1(49.149,31.623) ; v1(62.611,31.623) 62.611,31.75 63.285,32.424 ; ENCODER.1 63.707,32.846 63.285,32.424 ; ENCODER.4 67.457,43 U3.23@68.595,44.138 ; U3.23 68.595,44.435 U3.23@68.595,44.138 ; 63.285,32.424 71.247,32.424 72.351,33.528 72.37,33.528 72.37,38.247 68.58,42.037 68.595,42.052 U3.23@68.595,44.138
  Top Layer w0.642: U7.4 8.787,16.256 8.787,14.2 10.16,12.827 11.176,12.827 19.177,20.828 20.574,20.828 20.828,20.574 C14.1 20.828,22.208 21.457,22.837 23.345,22.837 25.908,25.4 25.908,32.869 L1.2 25.932,34.774 R2.1 22.733,41.402 v1(33.401,30.734) ; v1(33.401,18.923) 35.519,18.923 U8.3 35.574,18.478 35.567,18.471 35.567,16.65 ; C17.2 33.655,16.129 34.176,16.65 35.567,16.65 ; C18.2 35.567,14.829 35.567,16.65
  Bottom Layer w0.4: v1(8.792,50.09) 8.792,45.945 20.955,33.782 v1(20.955,33.655) ; v1(12.827,52.07) 12.827,52.197 24.245,63.615 v1(24.245,75.577) 24.245,79.387 25.388,80.53 v1@34.405,80.53 ; v1@34.786,80.53 34.798,80.518 v1(34.798,80.264) ; v1(49.149,31.623) v1(62.611,31.623)
  Bottom Layer w0.642: v1(33.401,18.923) v1@33.401,30.988
15V: "M DIR.4" "M ESQ.4" C7.2 C8.2 U2.3 | length 39.9
  Top Layer w0.254: 34.417,8.533 34.425,8.541
  Top Layer w0.4: 34.417,8.787 34.417,8.533 34.417,5.588 36.195,3.81 48.768,3.81 50.681,5.723 50.681,8.922 50.781,9.022 50.781,10.395 51.054,10.668 51.054,13.462 49.819,14.697 C7.2 47.752,15.748 47.103,16.397 46.242,16.397 ; C8.2 45.847,16.002 46.242,16.397 ; U2.3 46.242,16.397
ARMA: ESC.2 U3.27 | length 51.4
  Top Layer w0.4: ESC.2 38.413,53.281 39.61,52.084 51.04,52.084 58.449,44.675 U3.27
BAT1S: R15.1 R20.2 U3.5 | length 4.4
  Top Layer w0.4: R20.2 35.565,57.605 35.565,59.685 U3.5 R15.1
BAT2S: R1.1 R14.1 R19.2 U3.6 | length 37.1
  Top Layer w0.4: R1.1 18.669,45.085 v1(20.193,46.609) ; v1(20.168,56.058) 36.316,56.058 37.833,57.575 38.075,57.575 R19.2 38.115,57.615 38.115,59.675 U3.6 R14.1
  Bottom Layer w0.4: v1(20.168,56.058) 20.193,56.032 v1(20.193,46.609)
BAT3S: R13.1 R18.2 U3.7 | length 4.4
  Top Layer w0.4: R13.1 U3.7 40.718,59.641 40.718,57.625 40.743,57.6 R18.2
BAT4S: R12.1 R17.2 U3.8 | length 4.4
  Top Layer w0.4: R17.2 43.195,57.615 43.195,59.675 U3.8 R12.1
BAT5S: R11.1 R16.2 U3.9 | length 4.4
  Top Layer w0.4: R11.1 U3.9 45.798,59.641 45.798,57.625 45.823,57.6 R16.2
BP3V3: R8.2 R9.1 R10.2 U3.21 | length 96.5
  Top Layer w0.4: R8.2 8.578,55.568 7.239,54.229 7.239,48.113 7.473,47.879 7.493,47.879 10.033,45.339 11.957,45.339 14.682,48.064 R10.2 R10.2@14.782,48.064 ; R9.1 14.757,50.706 17.493,50.706 v2(17.653,50.546) ; v2(17.653,46.863) 15.983,46.863 R10.2@14.782,48.064 ; v2(43.688,48.26) 43.453,48.26 43.257,48.064 R10.2@14.782,48.064 ; v1(56.261,49.53) v1(61.214,49.53)
  Bottom Layer w0.4: v2(17.653,46.863) v2(17.653,50.546) ; v2(43.688,48.26) 54.991,48.26 v1(56.261,49.53) ; v1(61.214,49.53) 70.231,49.53 73.689,46.072 U3.21
"ENCODER D+": ENCODER.3 U3.29 | length 19.2
  Top Layer w0.4: U3.29 56.808,41.012 v1(61.477,41.012) ; v1(66.167,41.275) 66.207,41.235 ENCODER.3
  Bottom Layer w0.4: v1(61.477,41.012) 65.904,41.012 v1(66.167,41.275)
"ENCODER D-": ENCODER.2 U3.28 | length 14.6
  Top Layer w0.4: U3.28 57.941,42.418 62.738,42.418 64.957,40.199 ENCODER.2
"ENCODER E+": ENCODER.6 U3.31 | length 27.1
  Top Layer w0.4: U3.31 48.566,44.45 55.297,37.719 v1(61.468,37.719) ; ENCODER.6 69.904,36.503 69.904,38.535 v1(69.977,38.608)
  Bottom Layer w0.4: v1(61.468,37.719) 69.088,37.719 v1(69.977,38.608)
"ENCODER E-": ENCODER.5 U3.30 | length 24.2
  Top Layer w0.4: U3.30 56.163,39.116 v1(62.611,39.116) ; ENCODER.5 v1(68.707,40.132)
  Bottom Layer w0.4: v1(62.611,39.116) 67.691,39.116 v1(68.707,40.132)
INAD: "M DIR.1" U3.14 | length 73.4
  Top Layer w0.4: 31.425,8.541 31.525,8.641 31.525,10.316 32.639,11.43 36.195,11.43 37.719,12.954 37.719,15.621 38.335,16.237 38.335,20.301 v1(38.354,20.32) ; v1(53.848,20.447) v1(53.848,34.798) ; v1(57.404,53.721) 57.404,58.645 U3.14
  Bottom Layer w0.4: v1(38.354,20.32) 38.481,20.447 v1(53.848,20.447) ; v1(53.848,34.798) 53.848,36.576 57.245,39.973 57.245,45.043 57.404,45.201 v1(57.404,53.721)
INAE: "M ESQ.1" U3.13 | length 59.9
  Top Layer w0.4: v1(47.625,11.176) 47.625,8.724 47.681,8.668 ; U3.13 U3.13@55.958,59.69 ; v1(57.785,17.78) 57.785,33.147 v1(57.912,33.274)
  Bottom Layer w0.4: v1(47.625,11.176) 51.054,11.176 57.658,17.78 v1(57.785,17.78) ; U3.13 59.754,55.846 59.754,50.102 59.785,50.07 59.785,39.068 57.833,37.116 57.833,33.353 v1(57.912,33.274)
INT: U3.4 U6.12 | length 32.5
  Top Layer w0.178: U3.4@33.02,59.661 U3.4 ; v3(36.83,46.355) 36.83,44.069 v3(41.148,39.751) ; U6.12 40.87,33.528 v4(41.275,33.528)
  Bottom Layer w0.178: U3.4 33.02,59.661 33.02,50.165 v3(36.83,46.355) ; v3(41.148,39.751) 41.275,39.624 v4(41.275,33.528)
MOTOR_D+: "M DIR.5" U3.34 | length 51.2
  Top Layer w0.4: 35.425,8.795 35.425,9.843 38.417,12.835 38.417,15.176 39.443,16.202 39.443,29.41 41.148,31.115 v1(46.609,31.115) ; U3.34 43.336,41.783 46.99,41.783 50.419,38.354 v1(50.419,35.179)
  Bottom Layer w0.4: v1(46.609,31.115) 46.609,31.242 50.419,35.052 v1(50.419,35.179)
MOTOR_D-: "M DIR.3" U3.33 | length 75.6
  Top Layer w0.4: 33.425,8.795 33.425,5.437 36.068,2.794 v1(54.864,2.794) ; U3.33 44.733,42.926 49.165,42.926 55.499,36.592 v1(55.499,12.192)
  Bottom Layer w0.4: v1(54.864,2.794) 54.753,2.905 54.753,11.211 55.499,11.957 v1(55.499,12.192)
MOTOR_E+: "M ESQ.5" U3.36 | length 48.6
  Top Layer w0.4: U3.36@35.565,44.445 U3.36 ; v1(48.768,41.783) 51.943,38.608 51.943,10.668 51.747,10.472 51.747,8.988 51.681,8.922
  Bottom Layer w0.4: U3.36 38.236,41.783 v1(48.768,41.783)
MOTOR_E-: "M ESQ.3" U3.35 | length 41.4
  Top Layer w0.4: U3.35 38.135,44.45 50.546,32.039 v1(50.546,17.907) ; v1(49.53,12.446) 49.681,12.295 49.681,8.922 49.681,8.668
  Bottom Layer w0.4: v1(49.53,12.446) 50.546,13.462 v1(50.546,17.907)
MUX_RX: U3.26 U4.5 | length 60.1
  Top Layer w0.4: U4.5 34.538,68.006 34.538,70.225 v1(34.544,70.231) ; U3.26 67.197,50.658 v1(67.197,63.486)
  Bottom Layer w0.4: v1(34.544,70.231) 40.513,70.231 41.529,71.247 45.974,71.247 50.546,66.675 63.738,66.675 66.927,63.486 v1(67.197,63.486)
NetC3_2: C3.2 C4.2 R2.2 R4.2 U1.3 | length 26.3
  Top Layer w0.4: 11.938,33.899 11.938,40.955 14.113,43.13 R4.2
  Top Layer w0.642: C4.2@10.301,32.17 10.301,34.053 10.455,33.899 11.938,33.899 13.054,33.899 C3.2 13.208,38.735 15.875,41.402 R2.2
NetC11_2: C11.2 U6.10 | length 8.7
  Top Layer w0.178: C11.2 34.163,33.274 37.719,33.274 38.3,33.855 U6.10
NetC13_2: C13.2 C15.2 C16.2 R1.2 R3.2 R4.1 U7.1 U8.1 | length 77.7
  Top Layer w0.4: R3.2 13.779,11.867 v1(13.78,13.526) ; R1.2 15.117,45.081 15.117,43.184 R4.1 v1(17.018,43.18) ; v1(19.05,28.448) v1(19.05,38.1)
  Top Layer w0.642: U7.1 3.543,16.4 3.543,12.878 C13.2 3.594,12.729 3.645,12.678 3.743,12.678 5.245,11.176 11.557,11.176 12.184,11.803 R3.2 14.216,11.803 19.177,16.764 27.292,16.764 C16.2@29.337,14.719 ; C16.2@29.376,14.758 31.141,14.758 C15.2 31.108,14.993 31.108,18.844 U8.1
  Bottom Layer w0.4: v1(13.78,13.526) 19.05,18.796 v1(19.05,28.448) ; v1(17.018,43.18) 17.018,40.132 v1(19.05,38.1)
NetD1_1: D1.1 L1.1 U7.2 | length 37.2
  Top Layer w0.642: U7.2 5.158,13.681 5.715,13.124 v1(5.715,12.954) ; v1(13.843,24.892) D1.1 18.685,25.047 16.232,27.5 L1.1 L1.1@17.272,31.853
  Bottom Layer w0.642: v1(5.715,12.954) 5.334,13.335 5.334,20.574 9.652,24.892 v1(13.843,24.892)
NetDS1_1: DS1.1 R5.1 | length 1.8
  Top Layer w0.381: R5.1 DS1.1
NetDS2_1: DS2.1 R6.1 | length 1.8
  Top Layer w0.642: DS2.1 R6.1
NetDS3_1: DS3.1 R7.1 | length 2.1
  Top Layer w0.4: R7.1 25.019,5.529 DS3.1
NetJ5_3: RECEPTOR.3 U4.12 | length 2.8
  Top Layer w0.4: RECEPTOR.3 34.254,73.918 34.532,73.64 U4.12
NetJ5_4: RECEPTOR.4 U4.13 | length 2.7
  Top Layer w0.4: RECEPTOR.4 33.258,75.922 33.258,73.253 U4.13
NetJ5_5: RECEPTOR.5 U4.14 | length 2.8
  Top Layer w0.4: U4.14 32.254,73.511 RECEPTOR.5
NetJ5_6: RECEPTOR.6 U4.15 | length 2.9
  Top Layer w0.4: U4.15 30.75,73.278 30.75,74.082 31.153,74.485 31.153,75.826 RECEPTOR.6
NetJ5_7: RECEPTOR.7 U4.1 | length 31.1
  Top Layer w0.4: U4.1@29.452,68.349 U4.1 25.092,67.999 22.086,71.005 22.086,79.006 25.134,82.054 27.801,82.054 30.254,79.601 RECEPTOR.7
NetJ5_8: RECEPTOR.8 U4.2 | length 28.1
  Top Layer w0.4: RECEPTOR.8 29.257,75.93 29.257,79.264 27.483,81.038 27.293,81.038 27.247,81.084 25.088,81.084 22.848,78.844 22.848,71.767 25.515,69.1 29.971,69.1 30.722,68.349 U4.2
NetJ6_1: "DIV BAT.1" R11.2 | length 8.8
  Top Layer w0.4: R11.2 48.639,62.984 52.195,66.54 52.195,67.324 52.295,67.424
NetJ6_2: "DIV BAT.2" R12.2 | length 10.5
  Top Layer w0.4: R12.2 43.259,62.984 44.213,63.937 48.76,63.937 51.195,66.372 51.195,67.324 51.295,67.424
NetJ6_3: "DIV BAT.3" R13.2 | length 12.8
  Top Layer w0.4: R13.2 40.64,63.013 40.669,63.043 40.669,64.163 41.021,64.515 48.521,64.515 50.195,66.189 50.195,67.324 50.295,67.424
NetJ6_4: "DIV BAT.4" R14.2 | length 14.2
  Top Layer w0.4: R14.2 38.129,64.106 39.116,65.092 47.955,65.092 49.195,66.332 49.195,67.324 49.295,67.424
NetJ6_5: "DIV BAT.5" R15.2 | length 15.8